# EAGLE board 555 Blink - Burn (EAGLE 6.2)
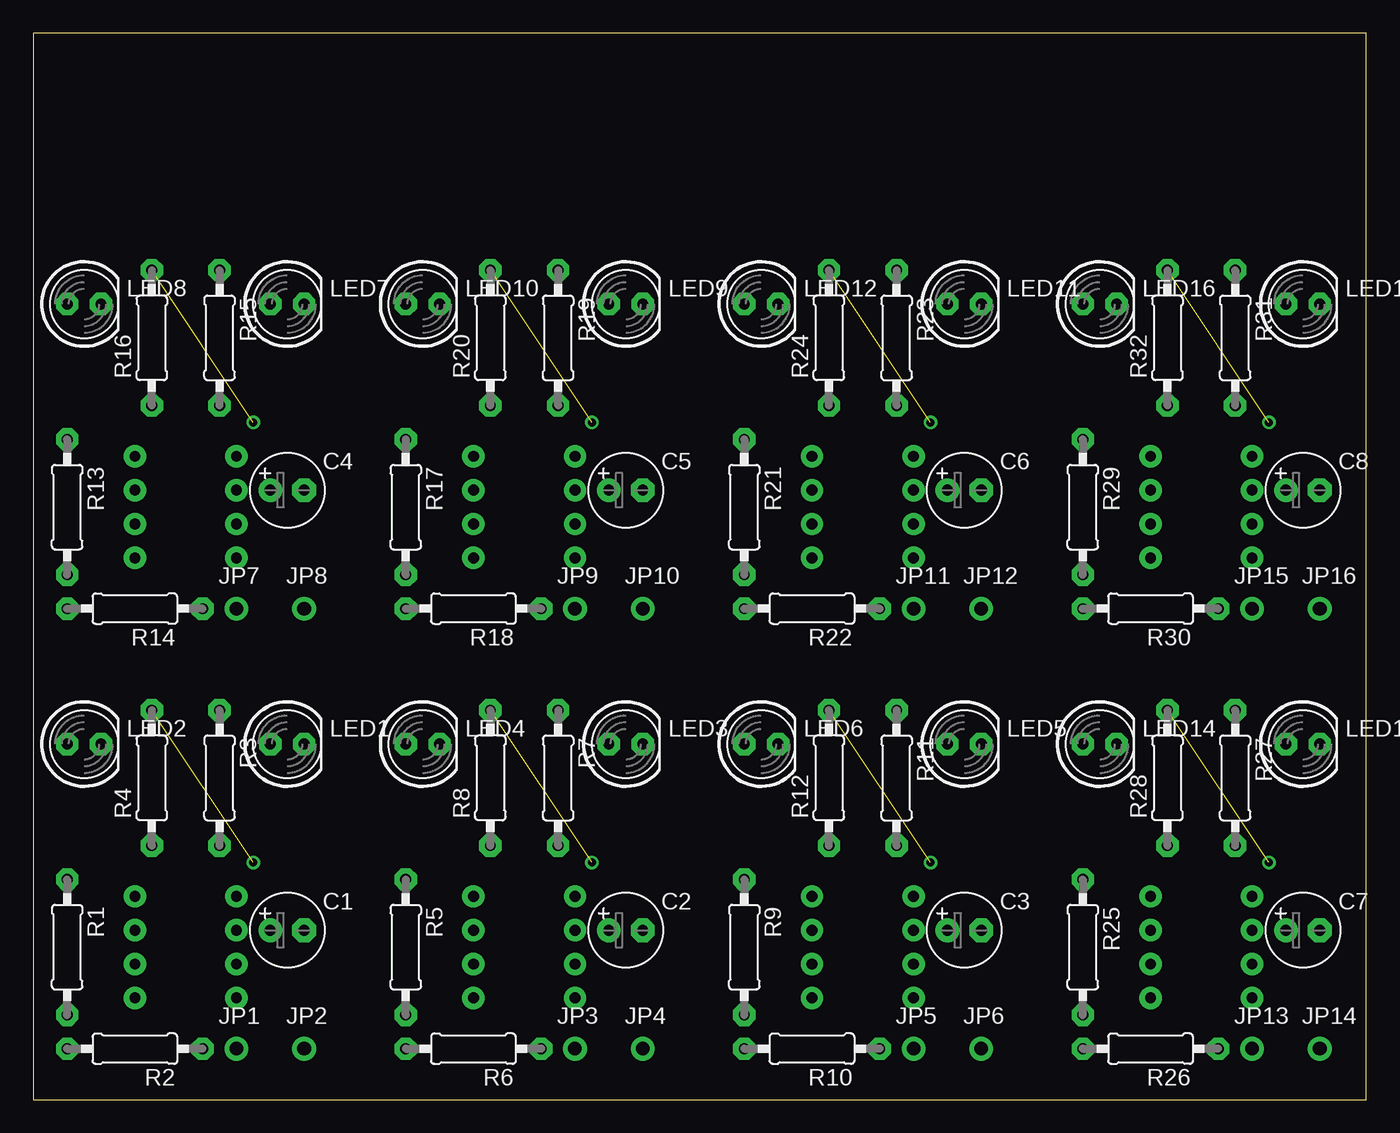
[diagram p0: board, top side]
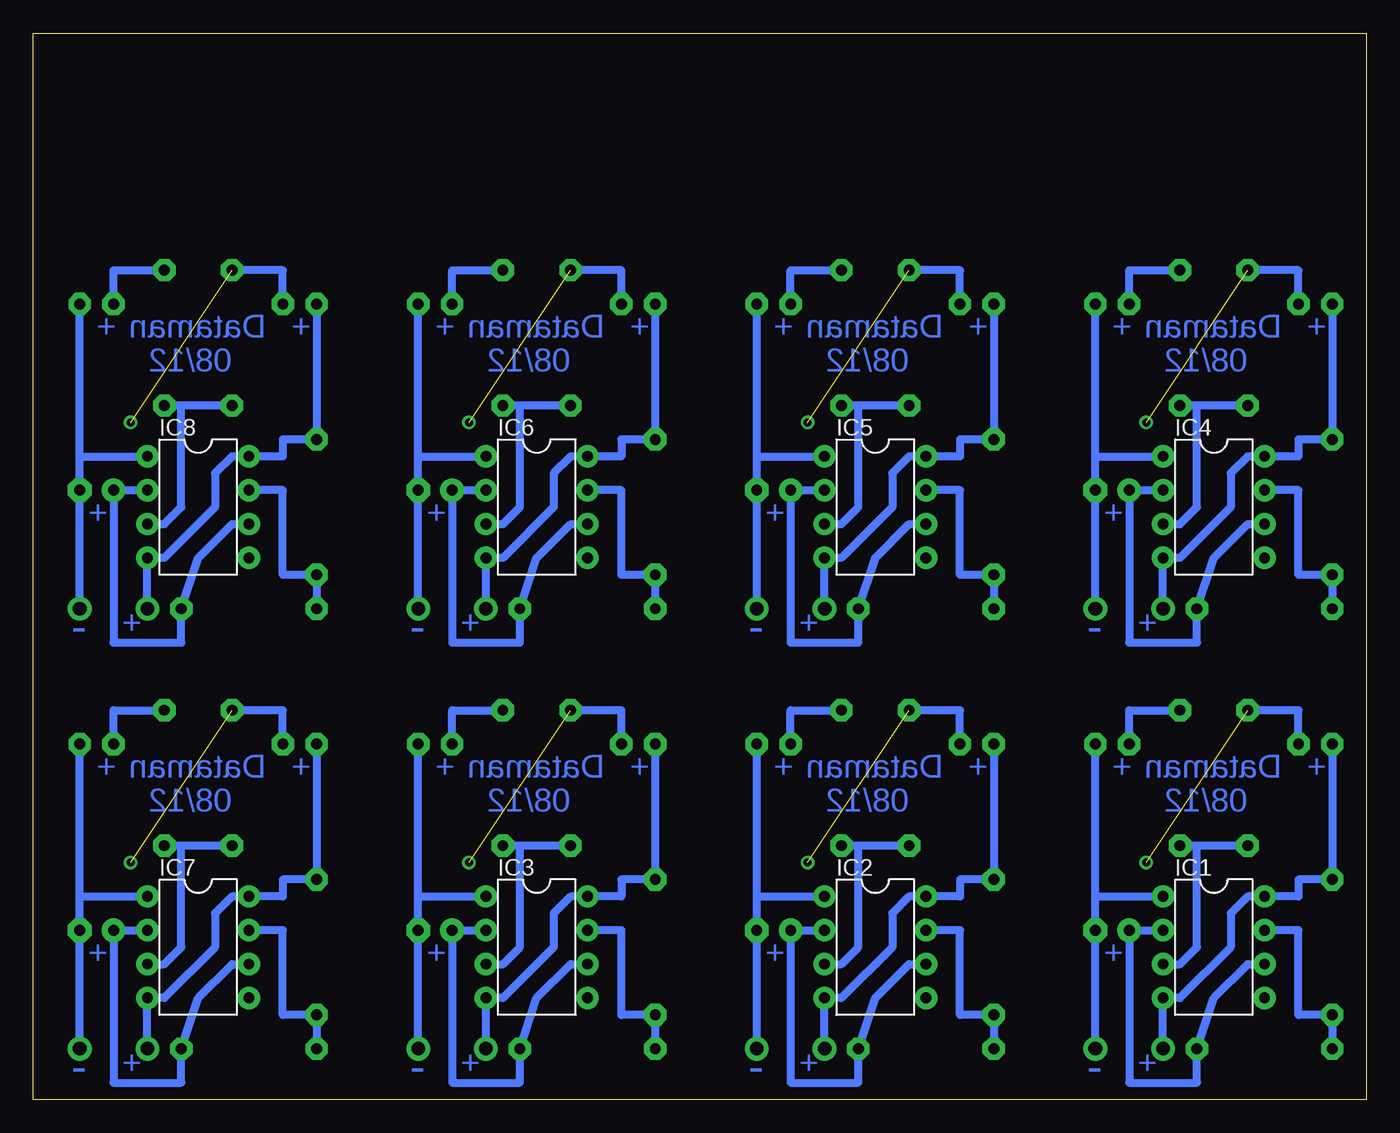
[diagram p1: board, bottom side, seen from below]

Size 100 x 80 mm. Coordinates in mm from the lower left corner, seen from the top.
Outline: 0,0 100,0 100,80 0,80 0,0
Copper layers (1*16): Top 0.035mm / dielectric 1.5mm / Bottom 0.035mm
Design rules: minimum track width 10mil, minimum drill 24mil, track to track 8mil, track to pad 8mil, pad to pad 8mil, via to via 8mil, smd to smd 8mil, copper to edge 40mil, drill to drill 8mil, minimum pad ring 10mil, minimum via ring 8mil, stop-mask expansion 4mil, vias tented up to drill 0mil, thermal gap 10mil

## Footprints (pad centres in the part's own frame; a part is rotated, then mirrored left to right if it is on the bottom)
E2,5-6 = drill 0.813 pad 1.778: + -1.27,0 | drill 0.813 pad 1.778 octagon: - 1.27,0
DIL08-ROUND = drill 0.813 pad 1.676: 1 -3.81,-3.81; 2 -1.27,-3.81; 3 1.27,-3.81; 4 3.81,-3.81; 5 3.81,3.81; 6 1.27,3.81; 7 -1.27,3.81; 8 -3.81,3.81
1X01-CLEANBIG = drill 1.016 pad 1.778: 1 0,0
LED5MM = drill 0.813 pad 1.676 octagon: A -1.27,0; K 1.27,0
0207/10 = drill 0.813 pad 1.676 octagon: 1 -5.08,0; 2 5.08,0

## Placement (x,y rotation side)
C1  [E2,5-6]  19.05,12.7 0 top
C2  [E2,5-6]  44.45,12.7 0 top
C3  [E2,5-6]  69.85,12.7 0 top
C4  [E2,5-6]  19.05,45.72 0 top
C5  [E2,5-6]  44.45,45.72 0 top
C6  [E2,5-6]  69.85,45.72 0 top
C7  [E2,5-6]  95.25,12.7 0 top
C8  [E2,5-6]  95.25,45.72 0 top
IC1  LM555N  [DIL08-ROUND]  11.43,11.43 270 bottom
IC2  LM555N  [DIL08-ROUND]  36.83,11.43 270 bottom
IC3  LM555N  [DIL08-ROUND]  62.23,11.43 270 bottom
IC4  LM555N  [DIL08-ROUND]  11.43,44.45 270 bottom
IC5  LM555N  [DIL08-ROUND]  36.83,44.45 270 bottom
IC6  LM555N  [DIL08-ROUND]  62.23,44.45 270 bottom
IC7  LM555N  [DIL08-ROUND]  87.63,11.43 270 bottom
IC8  LM555N  [DIL08-ROUND]  87.63,44.45 270 bottom
JP1  [1X01-CLEANBIG]  15.24,3.81 0 top
JP2  [1X01-CLEANBIG]  20.32,3.81 0 top
JP3  [1X01-CLEANBIG]  40.64,3.81 0 top
JP4  [1X01-CLEANBIG]  45.72,3.81 0 top
JP5  [1X01-CLEANBIG]  66.04,3.81 0 top
JP6  [1X01-CLEANBIG]  71.12,3.81 0 top
JP7  [1X01-CLEANBIG]  15.24,36.83 0 top
JP8  [1X01-CLEANBIG]  20.32,36.83 0 top
JP9  [1X01-CLEANBIG]  40.64,36.83 0 top
JP10  [1X01-CLEANBIG]  45.72,36.83 0 top
JP11  [1X01-CLEANBIG]  66.04,36.83 0 top
JP12  [1X01-CLEANBIG]  71.12,36.83 0 top
JP13  [1X01-CLEANBIG]  91.44,3.81 0 top
JP14  [1X01-CLEANBIG]  96.52,3.81 0 top
JP15  [1X01-CLEANBIG]  91.44,36.83 0 top
JP16  [1X01-CLEANBIG]  96.52,36.83 0 top
LED1  [LED5MM]  19.05,26.67 0 top
LED2  [LED5MM]  3.81,26.67 0 top
LED3  [LED5MM]  44.45,26.67 0 top
LED4  [LED5MM]  29.21,26.67 0 top
LED5  [LED5MM]  69.85,26.67 0 top
LED6  [LED5MM]  54.61,26.67 0 top
LED7  [LED5MM]  19.05,59.69 0 top
LED8  [LED5MM]  3.81,59.69 0 top
LED9  [LED5MM]  44.45,59.69 0 top
LED10  [LED5MM]  29.21,59.69 0 top
LED11  [LED5MM]  69.85,59.69 0 top
LED12  [LED5MM]  54.61,59.69 0 top
LED13  [LED5MM]  95.25,26.67 0 top
LED14  [LED5MM]  80.01,26.67 0 top
LED15  [LED5MM]  95.25,59.69 0 top
LED16  [LED5MM]  80.01,59.69 0 top
R1  100K  [0207/10]  2.54,11.43 270 top
R2  100K  [0207/10]  7.62,3.81 180 top
R3  470  [0207/10]  13.97,24.13 270 top
R4  470  [0207/10]  8.89,24.13 90 top
R5  100K  [0207/10]  27.94,11.43 270 top
R6  100K  [0207/10]  33.02,3.81 180 top
R7  470  [0207/10]  39.37,24.13 270 top
R8  470  [0207/10]  34.29,24.13 90 top
R9  100K  [0207/10]  53.34,11.43 270 top
R10  100K  [0207/10]  58.42,3.81 180 top
R11  470  [0207/10]  64.77,24.13 270 top
R12  470  [0207/10]  59.69,24.13 90 top
R13  100K  [0207/10]  2.54,44.45 270 top
R14  100K  [0207/10]  7.62,36.83 180 top
R15  470  [0207/10]  13.97,57.15 270 top
R16  470  [0207/10]  8.89,57.15 90 top
R17  100K  [0207/10]  27.94,44.45 270 top
R18  100K  [0207/10]  33.02,36.83 180 top
R19  470  [0207/10]  39.37,57.15 270 top
R20  470  [0207/10]  34.29,57.15 90 top
R21  100K  [0207/10]  53.34,44.45 270 top
R22  100K  [0207/10]  58.42,36.83 180 top
R23  470  [0207/10]  64.77,57.15 270 top
R24  470  [0207/10]  59.69,57.15 90 top
R25  100K  [0207/10]  78.74,11.43 270 top
R26  100K  [0207/10]  83.82,3.81 180 top
R27  470  [0207/10]  90.17,24.13 270 top
R28  470  [0207/10]  85.09,24.13 90 top
R29  100K  [0207/10]  78.74,44.45 270 top
R30  100K  [0207/10]  83.82,36.83 180 top
R31  470  [0207/10]  90.17,57.15 270 top
R32  470  [0207/10]  85.09,57.15 90 top

## Library data of the parts
C1-C8 IC1-IC8 JP1-JP16 LED1-LED16 R1-R32 = adafruit

## Nets
+9V: IC1.4 IC1.8 JP1.1 LED2.A R1.1
+9V1: IC2.4 IC2.8 JP3.1 LED4.A R5.1
+9V2: IC3.4 IC3.8 JP5.1 LED6.A R9.1
+9V3: IC4.4 IC4.8 JP7.1 LED8.A R13.1
+9V4: IC5.4 IC5.8 JP9.1 LED10.A R17.1
+9V5: IC6.4 IC6.8 JP11.1 LED12.A R21.1
+9V6: IC7.4 IC7.8 JP13.1 LED14.A R25.1
+9V7: IC8.4 IC8.8 JP15.1 LED16.A R29.1
GND: C1.- IC1.1 JP2.1 LED1.K
GND1: C2.- IC2.1 JP4.1 LED3.K
GND2: C3.- IC3.1 JP6.1 LED5.K
GND3: C4.- IC4.1 JP8.1 LED7.K
GND4: C5.- IC5.1 JP10.1 LED9.K
GND5: C6.- IC6.1 JP12.1 LED11.K
GND6: C7.- IC7.1 JP14.1 LED13.K
GND7: C8.- IC8.1 JP16.1 LED15.K
N$1: IC1.3 R3.2 R4.1
N$2: C1.+ IC1.2 IC1.6 R2.1
N$3: IC1.7 R1.2 R2.2
N$4: LED2.K R4.2
N$5: IC2.7 R5.2 R6.2
N$6: LED1.A R3.1
N$7: IC2.3 R7.2 R8.1
N$8: LED3.A R7.1
N$9: LED4.K R8.2
N$10: C2.+ IC2.2 IC2.6 R6.1
N$11: IC3.7 R9.2 R10.2
N$12: IC3.3 R11.2 R12.1
N$13: LED5.A R11.1
N$14: LED6.K R12.2
N$15: C3.+ IC3.2 IC3.6 R10.1
N$16: IC4.7 R13.2 R14.2
N$17: IC4.3 R15.2 R16.1
N$18: LED7.A R15.1
N$19: LED8.K R16.2
N$20: C4.+ IC4.2 IC4.6 R14.1
N$21: IC5.7 R17.2 R18.2
N$22: IC5.3 R19.2 R20.1
N$23: LED9.A R19.1
N$24: LED10.K R20.2
N$25: C5.+ IC5.2 IC5.6 R18.1
N$26: IC6.7 R21.2 R22.2
N$27: IC6.3 R23.2 R24.1
N$28: LED11.A R23.1
N$29: LED12.K R24.2
N$30: C6.+ IC6.2 IC6.6 R22.1
N$31: IC7.7 R25.2 R26.2
N$32: IC7.3 R27.2 R28.1
N$33: LED13.A R27.1
N$34: LED14.K R28.2
N$35: C7.+ IC7.2 IC7.6 R26.1
N$36: IC8.7 R29.2 R30.2
N$37: IC8.3 R31.2 R32.1
N$38: LED15.A R31.1
N$39: LED16.K R32.2
N$40: C8.+ IC8.2 IC8.6 R30.1

## Tracks (layer width: path | path; a pad name or v marks a point on that pad's centre or on a via)
+9V
  Bottom 0.61: JP1.1 IC1.4 13.97,7.62 10.16,11.43 10.16,13.97 8.89,15.24 IC1.8 5.08,15.24 5.08,16.51 R1.1 LED2.A
+9V1
  Bottom 0.61: JP3.1 IC2.4 39.37,7.62 35.56,11.43 35.56,13.97 34.29,15.24 IC2.8 30.48,15.24 30.48,16.51 R5.1 LED4.A
+9V2
  Bottom 0.61: JP5.1 IC3.4 64.77,7.62 60.96,11.43 60.96,13.97 59.69,15.24 IC3.8 55.88,15.24 55.88,16.51 R9.1 LED6.A
+9V3
  Bottom 0.61: JP7.1 IC4.4 13.97,40.64 10.16,44.45 10.16,46.99 8.89,48.26 IC4.8 5.08,48.26 5.08,49.53 R13.1 LED8.A
+9V4
  Bottom 0.61: JP9.1 IC5.4 39.37,40.64 35.56,44.45 35.56,46.99 34.29,48.26 IC5.8 30.48,48.26 30.48,49.53 R17.1 LED10.A
+9V5
  Bottom 0.61: JP11.1 IC6.4 64.77,40.64 60.96,44.45 60.96,46.99 59.69,48.26 IC6.8 55.88,48.26 55.88,49.53 R21.1 LED12.A
+9V6
  Bottom 0.61: JP13.1 IC7.4 90.17,7.62 86.36,11.43 86.36,13.97 85.09,15.24 IC7.8 81.28,15.24 81.28,16.51 R25.1 LED14.A
+9V7
  Bottom 0.61: JP15.1 IC8.4 90.17,40.64 86.36,44.45 86.36,46.99 85.09,48.26 IC8.8 81.28,48.26 81.28,49.53 R29.1 LED16.A
GND
  Bottom 0.61: JP2.1 C1.- 20.32,15.24 | 20.32,15.24 LED1.K | 20.32,15.24 IC1.1
GND1
  Bottom 0.61: JP4.1 C2.- 45.72,15.24 | 45.72,15.24 LED3.K | 45.72,15.24 IC2.1
GND2
  Bottom 0.61: JP6.1 C3.- 71.12,15.24 | 71.12,15.24 LED5.K | 71.12,15.24 IC3.1
GND3
  Bottom 0.61: JP8.1 C4.- 20.32,48.26 | 20.32,48.26 LED7.K | 20.32,48.26 IC4.1
GND4
  Bottom 0.61: JP10.1 C5.- 45.72,48.26 | 45.72,48.26 LED9.K | 45.72,48.26 IC5.1
GND5
  Bottom 0.61: JP12.1 C6.- 71.12,48.26 | 71.12,48.26 LED11.K | 71.12,48.26 IC6.1
GND6
  Bottom 0.61: JP14.1 C7.- 96.52,15.24 | 96.52,15.24 LED13.K | 96.52,15.24 IC7.1
GND7
  Bottom 0.61: JP16.1 C8.- 96.52,48.26 | 96.52,48.26 LED15.K | 96.52,48.26 IC8.1
N$1
  Bottom 0.61: R4.1 12.7,19.05 | 12.7,19.05 R3.2 | IC1.3 13.97,10.16 12.7,11.43 12.7,19.05
N$2
  Bottom 0.61: IC1.2 C1.+ 17.78,1.27 12.7,1.27 R2.1 11.43,7.62 8.89,10.16 IC1.6
N$3
  Bottom 0.61: R2.2 R1.2 5.08,6.35 5.08,12.7 IC1.7
N$4  (via drill 0.6)  (1 unrouted)
  Bottom 0.61: LED2.K 5.08,29.21 R4.2
  other vias: 16.51,17.78
N$5
  Bottom 0.61: R6.2 R5.2 30.48,6.35 30.48,12.7 IC2.7
N$6
  Bottom 0.61: LED1.A 17.78,29.21 R3.1
N$7
  Bottom 0.61: R8.1 38.1,19.05 | 38.1,19.05 R7.2 | IC2.3 39.37,10.16 38.1,11.43 38.1,19.05
N$8
  Bottom 0.61: LED3.A 43.18,29.21 R7.1
N$9  (via drill 0.6)  (1 unrouted)
  Bottom 0.61: LED4.K 30.48,29.21 R8.2
  other vias: 41.91,17.78
N$10
  Bottom 0.61: IC2.2 C2.+ 43.18,1.27 38.1,1.27 R6.1 36.83,7.62 34.29,10.16 IC2.6
N$11
  Bottom 0.61: R10.2 R9.2 55.88,6.35 55.88,12.7 IC3.7
N$12
  Bottom 0.61: R12.1 63.5,19.05 | 63.5,19.05 R11.2 | IC3.3 64.77,10.16 63.5,11.43 63.5,19.05
N$13
  Bottom 0.61: LED5.A 68.58,29.21 R11.1
N$14  (via drill 0.6)  (1 unrouted)
  Bottom 0.61: LED6.K 55.88,29.21 R12.2
  other vias: 67.31,17.78
N$15
  Bottom 0.61: IC3.2 C3.+ 68.58,1.27 63.5,1.27 R10.1 62.23,7.62 59.69,10.16 IC3.6
N$16
  Bottom 0.61: R14.2 R13.2 5.08,39.37 5.08,45.72 IC4.7
N$17
  Bottom 0.61: R16.1 12.7,52.07 | 12.7,52.07 R15.2 | IC4.3 13.97,43.18 12.7,44.45 12.7,52.07
N$18
  Bottom 0.61: LED7.A 17.78,62.23 R15.1
N$19  (via drill 0.6)  (1 unrouted)
  Bottom 0.61: LED8.K 5.08,62.23 R16.2
  other vias: 16.51,50.8
N$20
  Bottom 0.61: IC4.2 C4.+ 17.78,34.29 12.7,34.29 R14.1 11.43,40.64 8.89,43.18 IC4.6
N$21
  Bottom 0.61: R18.2 R17.2 30.48,39.37 30.48,45.72 IC5.7
N$22
  Bottom 0.61: R20.1 38.1,52.07 | 38.1,52.07 R19.2 | IC5.3 39.37,43.18 38.1,44.45 38.1,52.07
N$23
  Bottom 0.61: LED9.A 43.18,62.23 R19.1
N$24  (via drill 0.6)  (1 unrouted)
  Bottom 0.61: LED10.K 30.48,62.23 R20.2
  other vias: 41.91,50.8
N$25
  Bottom 0.61: IC5.2 C5.+ 43.18,34.29 38.1,34.29 R18.1 36.83,40.64 34.29,43.18 IC5.6
N$26
  Bottom 0.61: R22.2 R21.2 55.88,39.37 55.88,45.72 IC6.7
N$27
  Bottom 0.61: R24.1 63.5,52.07 | 63.5,52.07 R23.2 | IC6.3 64.77,43.18 63.5,44.45 63.5,52.07
N$28
  Bottom 0.61: LED11.A 68.58,62.23 R23.1
N$29  (via drill 0.6)  (1 unrouted)
  Bottom 0.61: LED12.K 55.88,62.23 R24.2
  other vias: 67.31,50.8
N$30
  Bottom 0.61: IC6.2 C6.+ 68.58,34.29 63.5,34.29 R22.1 62.23,40.64 59.69,43.18 IC6.6
N$31
  Bottom 0.61: R26.2 R25.2 81.28,6.35 81.28,12.7 IC7.7
N$32
  Bottom 0.61: R28.1 88.9,19.05 | 88.9,19.05 R27.2 | IC7.3 90.17,10.16 88.9,11.43 88.9,19.05
N$33
  Bottom 0.61: LED13.A 93.98,29.21 R27.1
N$34  (via drill 0.6)  (1 unrouted)
  Bottom 0.61: LED14.K 81.28,29.21 R28.2
  other vias: 92.71,17.78
N$35
  Bottom 0.61: IC7.2 C7.+ 93.98,1.27 88.9,1.27 R26.1 87.63,7.62 85.09,10.16 IC7.6
N$36
  Bottom 0.61: R30.2 R29.2 81.28,39.37 81.28,45.72 IC8.7
N$37
  Bottom 0.61: R32.1 88.9,52.07 | 88.9,52.07 R31.2 | IC8.3 90.17,43.18 88.9,44.45 88.9,52.07
N$38
  Bottom 0.61: LED15.A 93.98,62.23 R31.1
N$39  (via drill 0.6)  (1 unrouted)
  Bottom 0.61: LED16.K 81.28,62.23 R32.2
  other vias: 92.71,50.8
N$40
  Bottom 0.61: IC8.2 C8.+ 93.98,34.29 88.9,34.29 R30.1 87.63,40.64 85.09,43.18 IC8.6

## Text on the board
Bottom: + | Dataman | + | + | Dataman | + | + | Dataman | + | + | Dataman | + | 08/12 | 08/12 | 08/12 | 08/12 | + | + | + | + | + | + | + | + | - | - | - | - | + | Dataman | + | + | Dataman | + | + | Dataman | + | + | Dataman | + | 08/12 | 08/12 | 08/12 | 08/12 | + | + | + | + | + | + | + | + | - | - | - | -